# Altium PCB Viper22PS.PcbDoc
Units mm, origin at the board's own origin, x right, y up, seen from the top; angles counter-clockwise.
Board outline 34.16 x 20.32 mm, 2 copper layers (Top Layer, Bottom Layer); 18 components, 10 nets, 46 pads, 16 vias.
Unrouted connection lines stored in the file: 1.
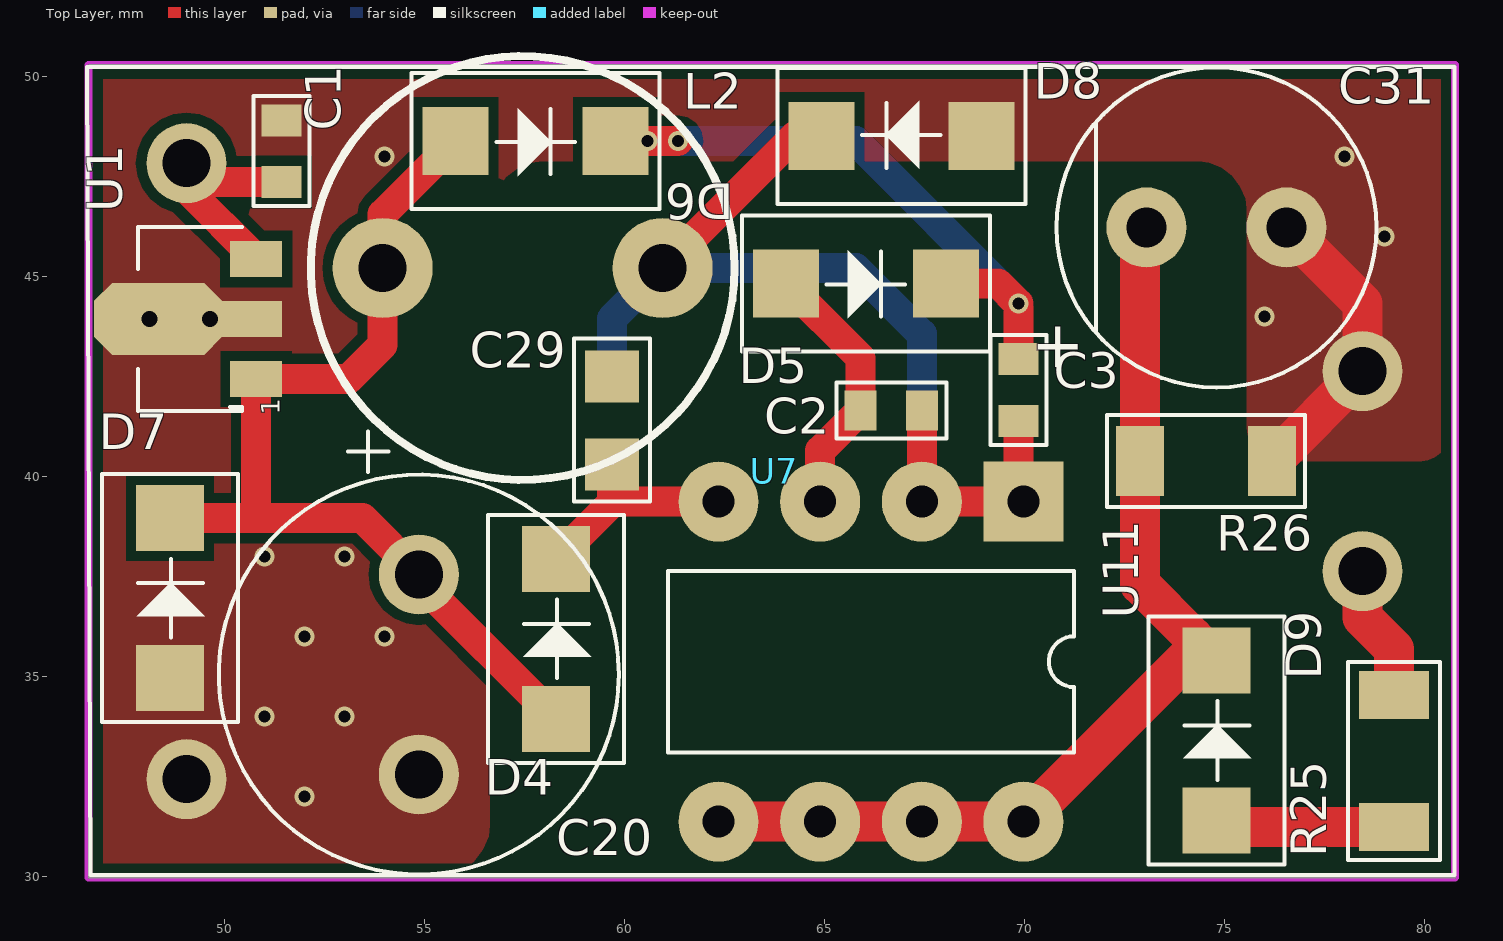
[diagram p0: Top Layer view]
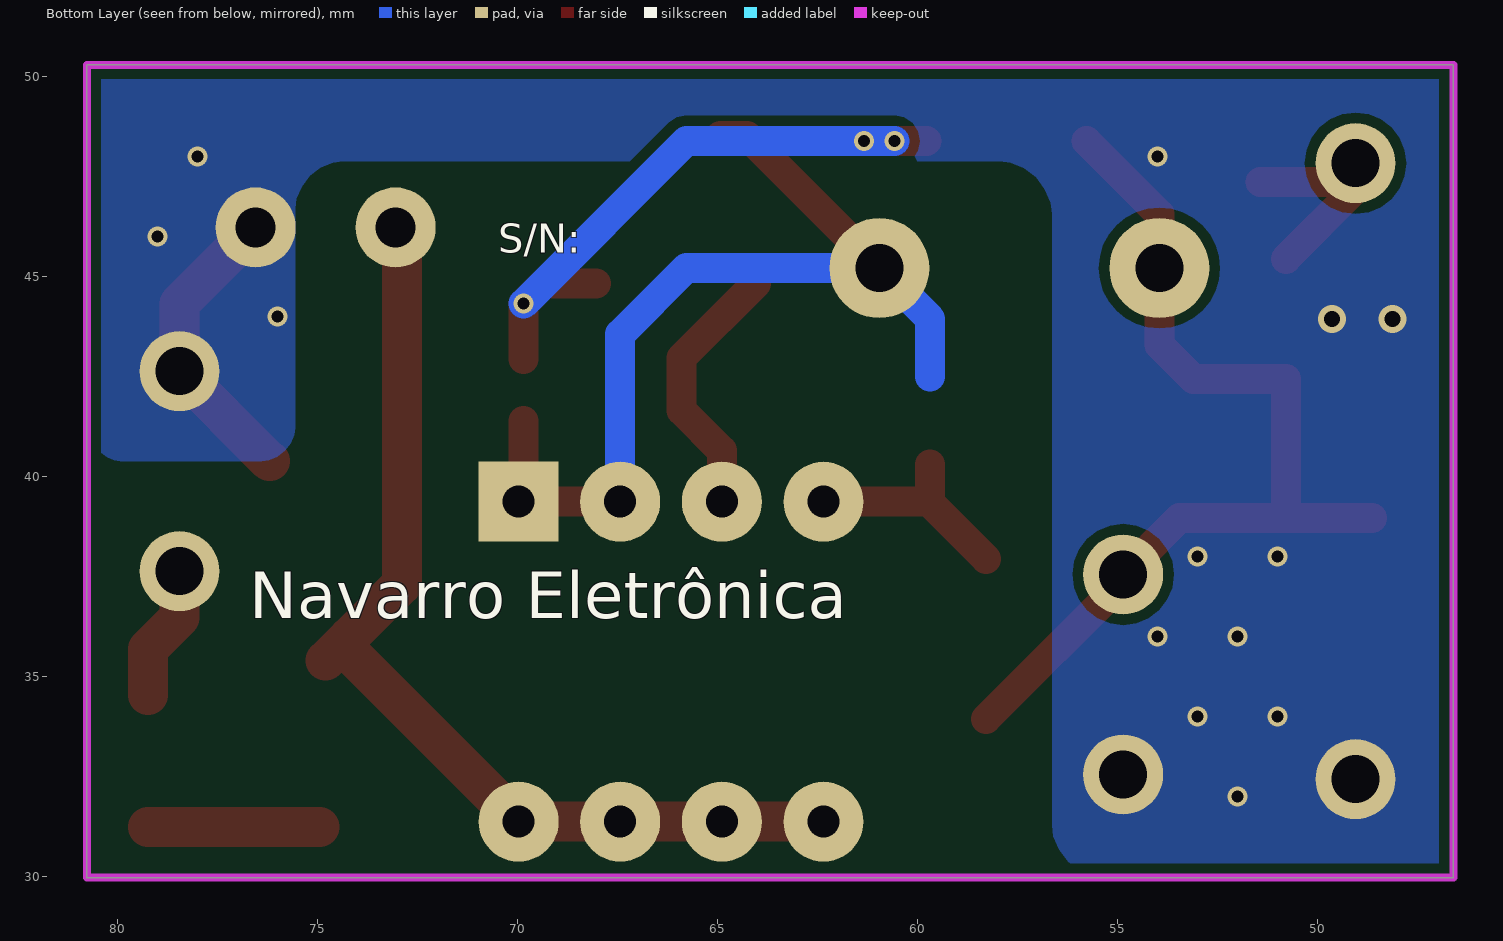
[diagram p1: Bottom Layer view, seen from below]
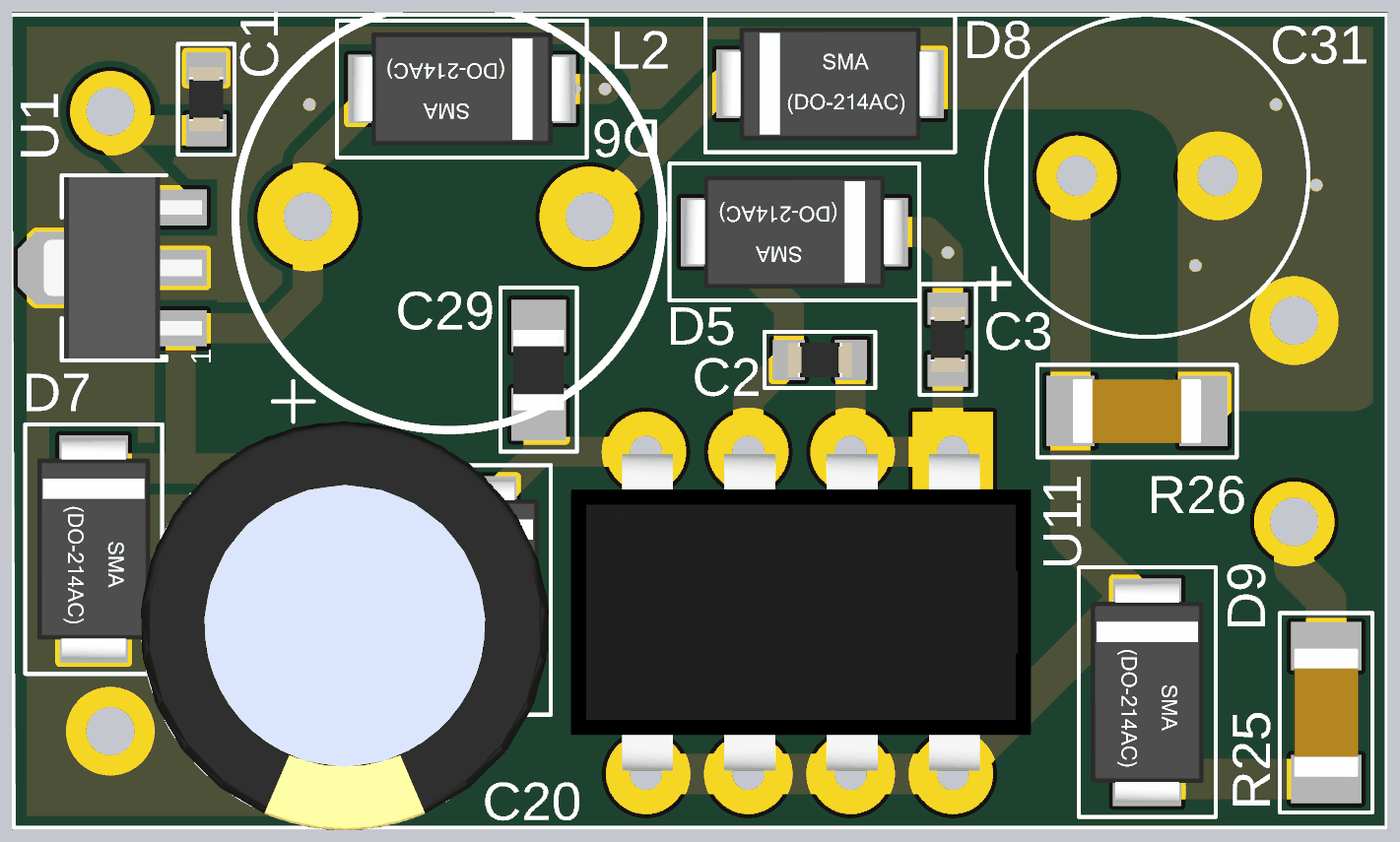
[diagram p2: 3D render of the assembled board from above, using the file's embedded part models]

## Layer stack, top to bottom
Top Solder: solder mask 0.0102, Solder Resist, Dk 3.5
Top Layer: signal copper 0.0356
Dielectric 1: dielectric 0.32, FR-4, Dk 4.8
Bottom Layer: signal copper 0.0356
Bottom Solder: solder mask 0.0102, Solder Resist, Dk 3.5

## Board outline
46.609,29.972 46.609,50.292 80.772,50.292 80.772,29.972

## Design rules (kind name [scope] priority, off if disabled: settings)
Clearance [All] p1: gap=0.254 ignorepadtopadclearanceinfootprint=FALSE except(0: Arc-Hole Track-Hole SMDPad-Hole THPad-Hole Via-Hole Fill-Hole Poly-Hole Region-Hole Text-Hole)
PolygonConnect [All] p1: connectstyle=Direct reliefconductorwidth=0.254 reliefentries=4 polygonreliefangle="90 Angle" airgapwidth=0.254
RoutingVias [All] p1: holewidth=0.711 width=1.27 viastyle="Through Hole" minholewidth=0.711 minwidth=1.27 maxholewidth=0.711 maxwidth=1.27
SolderMaskExpansion [All] p1: expansion=0.102
Width [All] p1: maxlimit=5 minlimit=0.254 preferedwidth=0.254
30 further rules are at their usual default settings.

## Components (designator, comment, footprint, x,y, rotation, side; value= is the part's Value field where it differs from the comment)
C1 "Capacitor Cerâmico" CC0603 51.435,48.133 r270 top
C2 "Capacitor Cerâmico" CC0603 66.675,41.656 r180 top
C3 "Capacitor Cerâmico" CC0603 69.85,42.164 r90 top
C20 "Capacitor Aluminio" CPOLRAD10X20 54.864,35.052 r90 top
C29 "Capacitor Cerâmico" CC0805 59.69,41.402 r270 top
C31 "Capacitor Eletrolítico" CPOLRAD8X12 74.803,46.228 r180 top
D4 "CGRA4007" SMA 58.293,35.941 r90 top
D5 "SMAJ5927B-TP" SMA 66.04,44.831 r0 top
D6 "CGRA4007" SMA 57.785,48.387 r0 top
D7 "3SMAJ5930B-TP" SMA 48.641,36.957 r90 top
D8 "STTH1R06A" SMA 66.929,48.514 r180 top
D9 "CGRA4007" SMA 74.803,33.401 r90 top
L2 "Indutor" Indutor_Viper 60.96,45.212 r180 top
R25 "Resistor" CC1206 79.248,32.893 r90 top
R26 "Resistor" CC1206 74.549,40.386 r180 top
U1 "MC78L05A" SOT-89-3N 49.149,43.942 r180 top
U7 "Hi-Link" Fonte-HILINK 63.754,40.132 r0 top locked
U11 "Viper22A" DIP8 69.977,39.37 r270 top

## Footprints (in the part's own frame and the unit in brackets; to place one, negate y for a bottom-side part, rotate by r counter-clockwise, add the part's x,y. Pads: shape width x height; smd on the part's side, far side on the other; paste and mask are expansions set on the pad)
CC0603 [mm] "Chip Resistor, 2-Leads, Body 1,6x0,8mm, IPC Medium Density"
  rect 0.8x1 smd: 1(-0.77,0) 2(0.77,0)
  silkscreen extent -1.38,-0.7 1.38,0.7, body extent -0.8,-0.42 0.8,0.43, height 0.45
CC0805 [mm] "Chip Resistor, 2-Leads, Body 2,0x1,2mm, IPC Medium Density"
  rect 1.3x1.35 smd: 1(-1.1,0) 2(1.1,0)
  silkscreen extent -2.05,-0.95 2.02,0.95, body extent -1,-0.62 1,0.63, height 0.6
CC1206 [mm] "Chip Resistor, 2-Leads, Body 3,2x1,6mm, IPC Medium Density"
  rect 1.2x1.75 smd: 1(-1.65,0) 2(1.65,0)
  silkscreen extent -2.47,-1.15 2.47,1.15, body extent -1.6,-0.8 1.6,0.8, height 1
CPOLRAD8X12 [mm]
  round 2 hole 1: 1(1.75,0) 2(-1.75,0)
  silkscreen extent -4,-4 4,4, body extent -3.95,-4 4,4, height 12
CPOLRAD10X20 [mm]
  round 2 hole 1.2: 1(2.5,0) 2(-2.5,0)
  silkscreen extent -5,-5 6.08,5, body extent -5.08,-5.08 5.08,5.06, height 20.32
DIP8 [mm]
  rect 2x2 hole 0.8: 1(0,0)
  round 2 hole 0.8: 2(0,-2.54) 3(0,-5.08) 4(0,-7.62) 5(8,-7.62) 6(8,-5.08) 7(8,-2.54) 8(8,0)
  silkscreen extent 1.74,-8.89 6.26,1.27, body extent 0.05,-9.49 7.92,1.94, height 4.19
Fonte-HILINK [mm]
  round 2 hole 1.2: 1(-14.7,7.7) 2(-14.7,-7.7) 3(14.7,-2.5) 4(14.7,2.5)
  silkscreen extent -17.19,-10.1 17,10.1
Indutor_Viper [mm]
  round 2.5 hole 1.2: 1(0,0) 2(7,0)
  silkscreen extent -1.8,-5.3 8.8,5.3
SMA [mm] "Molded Diode, 2-Leads, Body 4,3x2,5mm, IPC Medium Density"
  rect 1.65x1.7 smd: 1(-2,0) 2(2,0)
  silkscreen extent -3.1,-1.7 3.1,1.7, body extent -2.75,-1.4 2.75,1.4, height 2.6
SOT-89-3N [mm] "SOT89, 3-Leads, Body 4,5x2,4mm (max), Pitch 1,50mm, Lead Span 4,1mm, IPC High Density"
  rect 1.3x0.9 smd: 1(-1.65,1.5) 3(-1.65,-1.5)
  rect 1.5x0.9 smd: 2(-1.55,0)
  oct 3.2x1.8 smd: 2(0.8,0)
  silkscreen extent -1.3,-2.3 1.3,2.3, body extent -2.18,-2.25 1.75,2.25, height 1.4

## Part data
C1: library part "Cap 100nF 50V 0603 X7R", "Capacitor (Semiconductor SIM Model)"
C2: library part "Cap 22nF 50V 0603 X7R", "Capacitor (Semiconductor SIM Model)"
C3: library part "Cap 470nF 25V 0603 X7R", "Capacitor (Semiconductor SIM Model)"
C20: library part "PCap 220uF 50V CPOLRAD10X20 LOESR", "Polarized Capacitor"
C29: library part "Cap 4.7uF 50V 0805 X5R", "Capacitor (Semiconductor SIM Model)"
C31: library part "PCap 4.7uF 400V 8d.x12h.", "Polarized Capacitor (Radial)"
D4 D6 D9: library part "DP 1000V 1A SMA", "1 Amp General Purpose Rectifier"
D5: library part "DZ 12V 1.5W SMA", "Zener Diode"
D7: library part "DZ 16V 3W SMA", "Zener Diode"
D8: library part "DP 600V 1A SMA (2)", "1 Amp General Purpose Rectifier"
L2: library part "Ind 1mH 1211 70mA", "Inductor Shielded"
R25: library part "THRes 10R 5% 1020 1W", "Fusible Thin Film Chip Resistors"
R26: library part "Res 1M 1% 1206 1/4W"
U1: library part MC78L05, "Regulador Linear 5V"
U7: library part "Fonte Hi-Link", "Fonte chaveada isolada"
U11: "Low power OFF-line SMPS primary switcher"

## Via types
v1: diameter 0.5, hole 0.3, Top Layer to Bottom Layer, tented both sides, 14 vias
v2: diameter 0.7, hole 0.4, Top Layer to Bottom Layer, tented both sides, 2 vias

## Nets (pads, with @x,y where several pads share a name; then routed paths per layer and width w, separated by ;. In a path a pad name is that pad's centre, name@x,y a point inside that pad or via, vN(x,y) a via of type N, cw(c..) or ccw(c..) an arc to the next point about the centre after c; other vN are vias at no path point)
AC: R25.2 U7.3 | length 3.4
  Top Layer w1: U7.3 78.454,36.481 79.248,35.687 R25.2
GND: C1.1 C20.2 C31.2 D7.1 D8.1 R26.1 U1.2 U7.2 U7.4 | length 7.6
  Top Layer w1: R26.1 76.208,40.386 U7.4 78.454,44.327 C31.2
  other v1: 52,32 51,34 53,34 52,36 54,36 51,38 53,38 76,44 79,46 54,48 78,48
  other v2: 48.129,43.942 49.649,43.942
NetC2_1: C2.1 C3.1 C29.1 D8.2 L2.1 U11.1 U11.2 | length 26.6
  Top Layer w0.75: L2.1 64.262,48.514 D8.2 ; C2.1@67.437,41.41 U11.2 U11.1 69.85,39.497 C3.1
  Bottom Layer w0.75: 59.69,42.502 59.69,43.942 L2.1 65.786,45.212 67.437,43.561 U11.2
NetC2_2: C2.2 D5.1 U11.3 | length 6.7
  Top Layer w0.75: D5.1 65.905,42.966 C2.2 64.897,40.648 U11.3
NetC3_2: C3.2 D5.2 D6.2 | length 15.9
  Top Layer w0.75: D6.2 v1(60.579,48.387) v1(61.341,48.387) ; D5.2 69.342,44.831 v1(69.85,44.323) C3.2
  Bottom Layer w0.75: v1(60.579,48.387) 65.786,48.387 v1(69.85,44.323)
NetC20_1: C20.1 D4.1 D6.1 D7.2 L2.2 U1.1 | length 24.5
  Top Layer w0.75: D7.2 53.459,38.957 C20.1 ; 50.799,38.958 U1.1 53.11,42.442 53.96,43.292 L2.2 53.96,46.562 D6.1 ; C20.1@54.864,37.37 D4.1
NetC29_2: C29.2 D4.2 U11.4 | length 5.6
  Top Layer w0.75: D4.2 59.69,39.338 C29.2 ; 59.722,39.37 U11.4
NetC31_1: C31.1 D9.2 R26.2 U11.5 U11.6 U11.7 U11.8 | length 25.5
  Top Layer w1: U11.5 U11.6 U11.7 U11.8 74.216,35.609 D9.2@74.216,35.989 ; C31.1@72.899,46.074 R26.2 72.899,37.305 D9.2@74.216,35.989 ; D9.2 D9.2@74.216,35.989
NetD9_1: D9.1 R25.1 | length 4.3
  Top Layer w1: D9.1@74.961,31.243 R25.1
VCC: C1.2 U1.3 U7.1 | length 5.7
  Top Layer w0.75: U1.3 49.054,47.187 U7.1 49.523,47.363 C1.2

## Polygon pours and split planes (outlines as drawn)
GND on Bottom Layer "Top Layer-No Net" (solid, remove dead copper, pour order 2): 46.609,29.972 55.245,29.972 ccw(c55.245,31.369) 56.642,31.369 56.642,46.482 cw(c58.039,46.482) 58.039,47.879 74.295,47.879 cw(c74.295,46.609) 75.565,46.609 75.565,41.275 ccw(c76.454,41.275) 76.454,40.386 79.883,40.386 ccw(c79.883,41.148) 80.645,41.148 80.645,50.292 46.736,50.292 ccw(c46.736,50.165) 46.609,50.165
GND on Top Layer "Top Layer-No Net" (solid, remove dead copper, pour order 0): 46.609,29.972 55.245,29.972 ccw(c55.245,31.369) 56.642,31.369 56.642,46.482 cw(c58.039,46.482) 58.039,47.879 74.295,47.879 cw(c74.295,46.609) 75.565,46.609 75.565,41.275 ccw(c76.454,41.275) 76.454,40.386 79.883,40.386 ccw(c79.883,41.148) 80.645,41.148 80.645,50.292 46.736,50.292 ccw(c46.736,50.165) 46.609,50.165

## Keep-outs
Keep-Out Layer:
  lines w0.2: 46.609,29.972 46.609,30.099 46.609,50.292 80.772,50.292 80.772,29.972 46.609,29.972

## Silkscreen, mask and mechanical layers (free items; w line width, h text height)
Bottom Overlay:
  text "S/N:" at 70.485,45.339 h1.25
  text "Navarro Eletrônica" at 76.708,36.068 h2

## Text inside footprints (layer, text, board x,y; h text height)
C31: Top Overlay "+" at 71.512,44.135 h2 r180
U1: Top Overlay "1" at 51.549,41.542 h0.8 r90